# Altium PCB MAX96724_COUPON.PcbDoc
Units mm, origin at the board's own origin, x right, y up, seen from the top; angles counter-clockwise.
Board outline 191 x 184 mm, 2 copper layers (Top Layer, Bottom Layer); 179 components, 133 nets, 535 pads, 16 vias.
Unrouted connection lines stored in the file: 378.
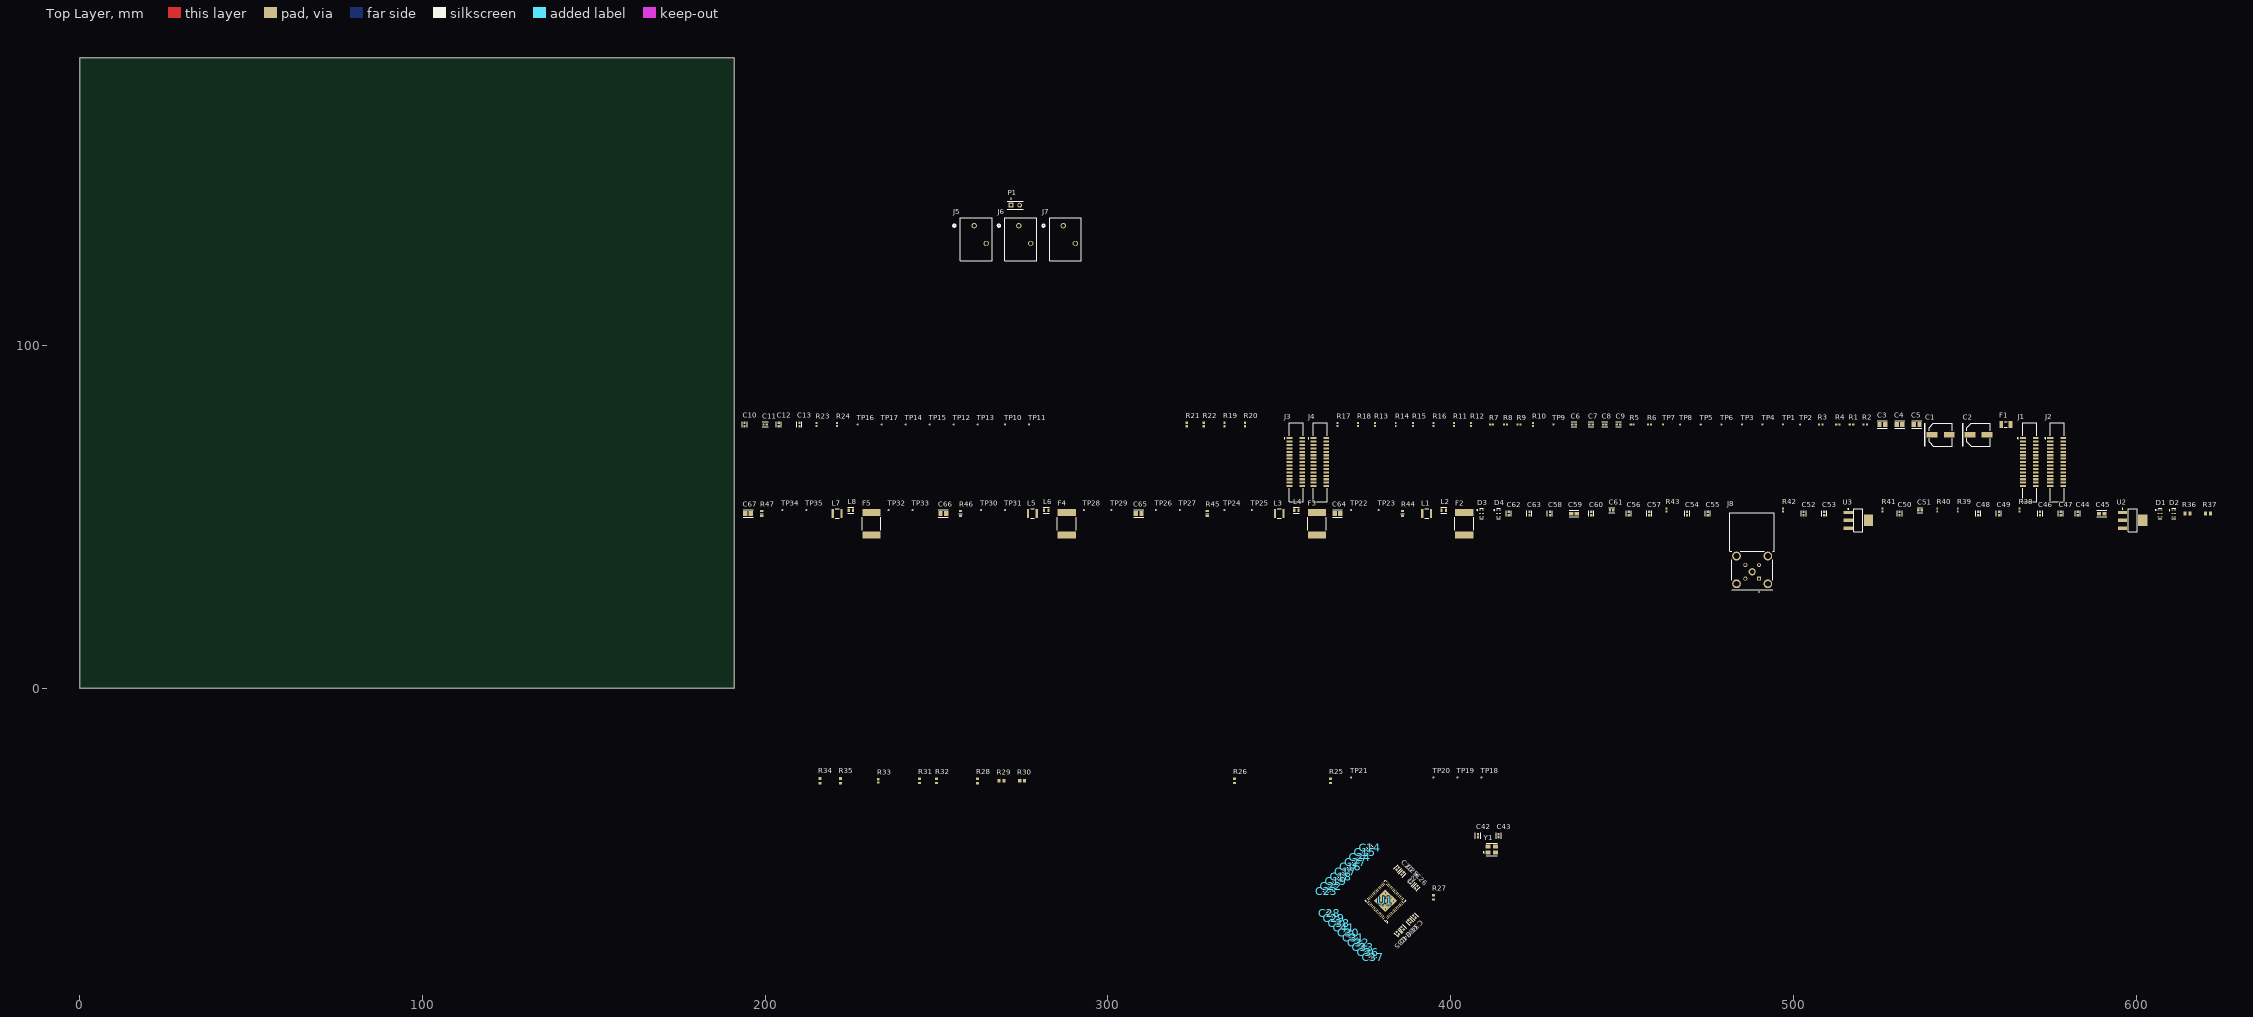
[diagram p0: Top Layer view]
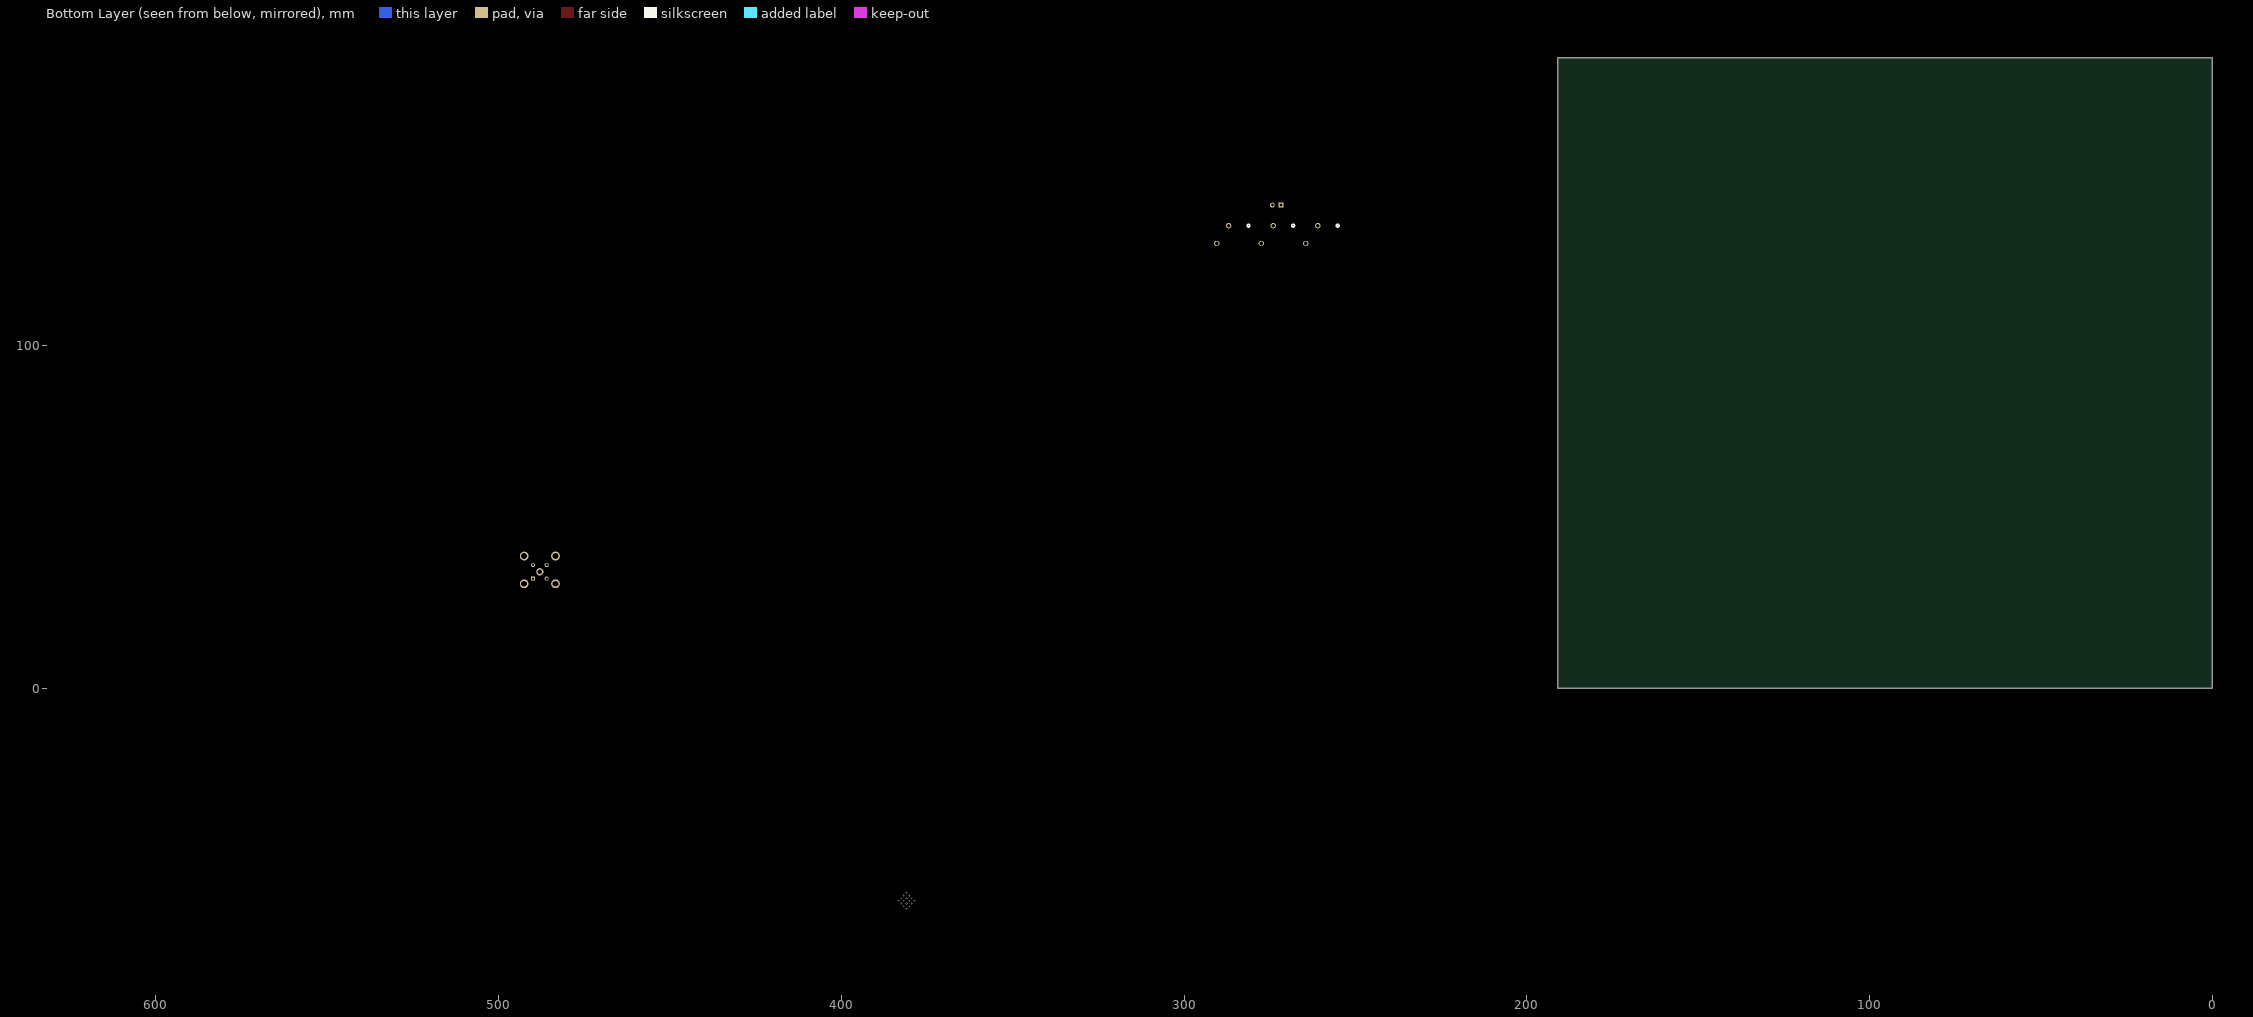
[diagram p1: Bottom Layer view, seen from below]

## Layer stack, top to bottom
Top Solder: solder mask 0.0102, Solder Resist, Dk 3.5
Top Layer: signal copper 0.0356
Dielectric 1: dielectric 0.32, FR-4, Dk 4.8
Bottom Layer: signal copper 0.0356
Bottom Solder: solder mask 0.0102, Solder Resist, Dk 3.5

## Board outline
0,0 0,184 191,184 191,0

## Design rules (kind name [scope] priority, off if disabled: settings)
Clearance [All] p1: gap=0.254 ignorepadtopadclearanceinfootprint=FALSE
DiffPairsRouting [All] p1: maxlimit=0.254 minlimit=0.254 mostfreqgap=0.254 toplayer_minwidth=0.381 toplayer_maxwidth=0.381 toplayer_prefwidth=0.381 bottomlayer_minwidth=0.381 bottomlayer_maxwidth=0.381 bottomlayer_prefwidth=0.381 maxuncoupledlength=12.7
PolygonConnect [All] p1: connectstyle=Relief reliefconductorwidth=0.254 reliefentries=4 polygonreliefangle="90 Angle" airgapwidth=0.254
RoutingVias [All] p1: holewidth=0.711 width=1.27 viastyle="Through Hole" minholewidth=0.711 minwidth=1.27 maxholewidth=0.711 maxwidth=1.27
SolderMaskExpansion [All] p1: expansion=0.102 istentingtop=FALSE
Width [All] p1: maxlimit=0.254 minlimit=0.254 preferedwidth=0.254
29 further rules are at their usual default settings.

## Classes and differential pairs
differential pair class 100DIFF: CKA CKB CKC CKF CSI0_CK CSI0_D0 CSI0_D1 CSI0_D2 CSI0_D3 CSI1_CK CSI1_D0 CSI1_D1 CSI1_D2 CSI1_D3 DA0 DA1 DA2 DA3 DB0 DB1 DB2 DB3 SIOA SIOB SIOC SIOD
net class 50SINGLE: PoC_A PoC_B PoC_C PoC_D
component class MAX96724_COUPON: C1 C2 C3 C4 C5 C6 C7 C8 C9 C10 C11 C12 C13 F1 J1 J2 J3 J4 J5 J6 J7 P1 R1 R2 R3 R4 R5 R6 R7 R8 R9 R10 R11 R12 R13 R14 R15 R16 R17 R18 R19 R20 R21 R22 R23 R24 TP1 TP2 TP3 TP4 TP5 TP6 TP7 TP8 TP9 TP10 TP11 TP12 TP13 TP14 TP15 TP16 TP17
component class GMSL_DESERIALIZER_0: C14 C15 C16 C17 C18 C19 C20 C21 C22 C23 C24 C25 C26 C27 C28 C29 C30 C31 C32 C33 C34 C35 C36 C37 C38 C39 C40 C41 C42 C43 C44 C45 C46 C47 C48 C49 C50 C51 C52 C53 C54 C55 C56 C57 C58 C59 C60 C61 C62 C63 C64 C65 C66 C67 D1 D2 D3 D4 F2 F3 F4 F5 J8 L1 L2 L3 L4 L5 L6 L7 L8 R25 R26 R27 R28 R29 R30 R31 R32 R33 R34 R35 R36 R37 R38 R39 R40 R41 R42 R43 R44 R45 R46 R47 TP18 TP19 TP20 TP21 TP22 TP23 TP24 TP25 TP26 TP27 TP28 TP29 TP30 TP31 TP32 TP33 TP34 TP35 U1 U2 U3 Y1
differential pair X25: +X25_P -X25_N
differential pair SIOD: +SIOD_P -SIOD_N
differential pair SIOC: +SIOC_P -SIOC_N
differential pair SIOB: +SIOB_P -SIOB_N
differential pair SIOA: +SIOA_P -SIOA_N
differential pair DB3: +DB3_P -DB3_N
differential pair DB2: +DB2_P -DB2_N
differential pair DB1: +DB1_P -DB1_N
differential pair DB0: +DB0_P -DB0_N
differential pair DA3: +DA3_P -DA3_N
differential pair DA2: +DA2_P -DA2_N
differential pair DA1: +DA1_P -DA1_N
differential pair DA0: +DA0_P -DA0_N
differential pair CSI1_D3: +CSI1_D3_P -CSI1_D3_N
differential pair CSI1_D2: +CSI1_D2_P -CSI1_D2_N
differential pair CSI1_D1: +CSI1_D1_P -CSI1_D1_N
differential pair CSI1_D0: +CSI1_D0_P -CSI1_D0_N
differential pair CSI1_CK: +CSI1_CK_P -CSI1_CK_N
differential pair CSI0_D3: +CSI0_D3_P -CSI0_D3_N
differential pair CSI0_D2: +CSI0_D2_P -CSI0_D2_N
differential pair CSI0_D1: +CSI0_D1_P -CSI0_D1_N
differential pair CSI0_D0: +CSI0_D0_P -CSI0_D0_N
differential pair CSI0_CK: +CSI0_CK_P -CSI0_CK_N
differential pair CKF: +CKF_P -CKF_N
differential pair CKC: +CKC_P -CKC_N
differential pair CKB: +CKB_P -CKB_N
differential pair CKA: +CKA_P -CKA_N

## Components (designator, comment, footprint, x,y, rotation, side; value= is the part's Value field where it differs from the comment)
C1 "EEEFK1E101XP" PNSC-FK-V-D8_V 543.001,74.001 r0 top
C2 "EEEFK1E101XP" PNSC-FK-V-D8_V 554.001,74.001 r0 top
C3 "GRM21BR61E226ME44L" FP-GRM21B-0_2-e0_2_0_7-IPC_B 526.001,77.001 r0 top
C4 "GRM21BR61E226ME44L" FP-GRM21B-0_2-e0_2_0_7-IPC_B 531.001,77.001 r0 top
C5 "GRM21BR61E226ME44L" FP-GRM21B-0_2-e0_2_0_7-IPC_B 536.001,77.001 r0 top
C6 "100n" FP-0402-L_1_0_0_05-W_0_5-IPC_A 436.001,77.001 r0 top
C7 "10u" FP-0402-L_1_0_0_05-W_0_5-IPC_A 441.001,77.001 r0 top
C8 "100n" FP-0402-L_1_0_0_05-W_0_5-IPC_A 445.001,77.001 r0 top
C9 "10u" FP-0402-L_1_0_0_05-W_0_5-IPC_A 449.001,77.001 r0 top
C10 "100n" FP-0402-L_1_0_0_05-W_0_5-IPC_A 194.001,77.001 r90 top
C11 "10u" FP-0402-L_1_0_0_05-W_0_5-IPC_A 200.001,77.001 r0 top
C12 "100n" FP-0402-L_1_0_0_05-W_0_5-IPC_A 204.001,77.001 r90 top
C13 "10u" FP-0402-L_1_0_0_05-W_0_5-IPC_A 210.001,77.001 r90 top
C14 "100n" FP-0402-L_1_0_0_05-W_0_5-IPC_A 376.536,-46.464 r135 top
C15 "100n" FP-0402-L_1_0_0_05-W_0_5-IPC_A 375.121,-47.879 r135 top
C16 "100n" FP-0402-L_1_0_0_05-W_0_5-IPC_A 370.879,-52.121 r135 top
C17 "100n" FP-0402-L_1_0_0_05-W_0_5-IPC_A 369.464,-53.536 r135 top
C18 "100n" FP-0402-L_1_0_0_05-W_0_5-IPC_A 368.05,-54.95 r135 top
C19 "100n" FP-0402-L_1_0_0_05-W_0_5-IPC_A 366.636,-56.364 r135 top
C20 "220n" FP-0402-L_1_0_0_05-W_0_5-IPC_A 384.586,-52.586 r45 top
C21 "220n" FP-0402-L_1_0_0_05-W_0_5-IPC_A 390,-58 r45 top
C22 "100n" FP-0402-L_1_0_0_05-W_0_5-IPC_A 365.222,-57.778 r135 top
C23 "100n" FP-0402-L_1_0_0_05-W_0_5-IPC_A 363.808,-59.192 r135 top
C24 "100n" FP-0402-L_1_0_0_05-W_0_5-IPC_A 373.707,-49.293 r135 top
C25 "220n" FP-0402-L_1_0_0_05-W_0_5-IPC_A 386.001,-54 r45 top
C26 "220n" FP-0402-L_1_0_0_05-W_0_5-IPC_A 388.586,-56.586 r45 top
C27 "100n" FP-0402-L_1_0_0_05-W_0_5-IPC_A 372.293,-50.707 r135 top
C28 "100n" FP-0402-L_1_0_0_05-W_0_5-IPC_A 364.686,-65.686 r225 top
C29 "100n" FP-0402-L_1_0_0_05-W_0_5-IPC_A 366.101,-67.101 r225 top
C30 "100n" FP-0402-L_1_0_0_05-W_0_5-IPC_A 370.343,-71.343 r225 top
C31 "100n" FP-0402-L_1_0_0_05-W_0_5-IPC_A 371.757,-72.757 r225 top
C32 "100n" FP-0402-L_1_0_0_05-W_0_5-IPC_A 373.172,-74.172 r225 top
C33 "100n" FP-0402-L_1_0_0_05-W_0_5-IPC_A 374.586,-75.586 r225 top
C34 "220n" FP-0402-L_1_0_0_05-W_0_5-IPC_A 389.414,-66.586 r315 top
C35 "220n" FP-0402-L_1_0_0_05-W_0_5-IPC_A 384.586,-71.414 r315 top
C36 "100n" FP-0402-L_1_0_0_05-W_0_5-IPC_A 376,-77 r225 top
C37 "100n" FP-0402-L_1_0_0_05-W_0_5-IPC_A 377.414,-78.414 r225 top
C38 "100n" FP-0402-L_1_0_0_05-W_0_5-IPC_A 367.515,-68.515 r225 top
C39 "220n" FP-0402-L_1_0_0_05-W_0_5-IPC_A 388,-68 r315 top
C40 "220n" FP-0402-L_1_0_0_05-W_0_5-IPC_A 386,-70 r315 top
C41 "100n" FP-0402-L_1_0_0_05-W_0_5-IPC_A 368.929,-69.929 r225 top
C42 "30p" FP-0402-L_1_0_0_05-W_0_5-IPC_A 408,-43 r90 top
C43 "30p" FP-0402-L_1_0_0_05-W_0_5-IPC_A 414,-43 r90 top
C44 "100n" FP-0402-L_1_0_0_05-W_0_5-IPC_A 583.001,51.001 r90 top
C45 "GRM188R60J106ME47D" FP-GRM188-0_1-e0_2_0_55-IPC_A 590.001,51.001 r0 top
C46 "10u" FP-0402-L_1_0_0_05-W_0_5-IPC_A 572.001,51.001 r90 top
C47 "100n" FP-0402-L_1_0_0_05-W_0_5-IPC_A 578.001,51.001 r90 top
C48 "10u" FP-0402-L_1_0_0_05-W_0_5-IPC_A 554.001,51.001 r90 top
C49 "100n" FP-0402-L_1_0_0_05-W_0_5-IPC_A 560.001,51.001 r90 top
C50 "10u" FP-0402-L_1_0_0_05-W_0_5-IPC_A 531.001,51.001 r90 top
C51 "100n" FP-0402-L_1_0_0_05-W_0_5-IPC_A 537.001,52.001 r0 top
C52 "10u" FP-0402-L_1_0_0_05-W_0_5-IPC_A 503.001,51.001 r90 top
C53 "100n" FP-0402-L_1_0_0_05-W_0_5-IPC_A 509.001,51.001 r90 top
C54 "10u" FP-0402-L_1_0_0_05-W_0_5-IPC_A 469.001,51.001 r90 top
C55 "10n" FP-0402-L_1_0_0_05-W_0_5-IPC_A 475.001,51.001 r90 top
C56 "10u" FP-0402-L_1_0_0_05-W_0_5-IPC_A 452.001,51.001 r90 top
C57 "10n" FP-0402-L_1_0_0_05-W_0_5-IPC_A 458.001,51.001 r90 top
C58 "100n" FP-0402-L_1_0_0_05-W_0_5-IPC_A 429.001,51.001 r90 top
C59 "GRM188R60J106ME47D" FP-GRM188-0_1-e0_2_0_55-IPC_A 436.001,51.001 r0 top
C60 "10u" FP-0402-L_1_0_0_05-W_0_5-IPC_A 441.001,51.001 r90 top
C61 "10n" FP-0402-L_1_0_0_05-W_0_5-IPC_A 447.001,52.001 r0 top
C62 "10u" FP-0402-L_1_0_0_05-W_0_5-IPC_A 417.001,51.001 r90 top
C63 "10n" FP-0402-L_1_0_0_05-W_0_5-IPC_A 423.001,51.001 r90 top
C64 "GRM21BR61E226ME44L" FP-GRM21B-0_2-e0_2_0_7-IPC_B 367.001,51.001 r0 top
C65 "GRM21BR61E226ME44L" FP-GRM21B-0_2-e0_2_0_7-IPC_B 309.001,51.001 r0 top
C66 "GRM21BR61E226ME44L" FP-GRM21B-0_2-e0_2_0_7-IPC_B 252.001,51.001 r0 top
C67 "GRM21BR61E226ME44L" FP-GRM21B-0_2-e0_2_0_7-IPC_B 195.001,51.001 r0 top
D1 "ESD204DQAR" FP-DQA0010A-MFG 607.001,51.001 r0 top value=0.55pF
D2 "ESD204DQAR" FP-DQA0010A-MFG 611.001,51.001 r0 top value=0.55pF
D3 "ESD204DQAR" FP-DQA0010A-MFG 409.001,51.001 r0 top value=0.55pF
D4 "ESD204DQAR" FP-DQA0010A-MFG 414.001,51.001 r0 top value=0.55pF
F1 "0466002.NR" FP-0466-MFG 562.001,77.001 r0 top value=0.03Ω
F2 "2920L050DR" FP-2920L050DR-MFG 404.001,48.001 r90 top
F3 "2920L050DR" FP-2920L050DR-MFG 361.001,48.001 r90 top
F4 "2920L050DR" FP-2920L050DR-MFG 288.001,48.001 r90 top
F5 "2920L050DR" FP-2920L050DR-MFG 231.001,48.001 r90 top
J1 "1-1734248-5" FP-1-1734248-5-MFG 569.001,66.001 r90 top
J2 "1-1734248-5" FP-1-1734248-5-MFG 577.001,66.001 r90 top
J3 "1-1734248-5" FP-1-1734248-5-MFG 355.001,66.001 r90 top
J4 "1-1734248-5" FP-1-1734248-5-MFG 362.001,66.001 r90 top
J5 "1-2834011-2" 1-2834011-2-Footprint-1 261.001,135.001 r0 top
J6 "1-2834011-2" 1-2834011-2-Footprint-1 274.001,135.001 r0 top
J7 "1-2834011-2" 1-2834011-2-Footprint-1 287.001,135.001 r0 top
J8 "FM4-NZRP-PCB-1" FM4-NZRP-PCB-1-Footprint-1 488.001,34.001 r90 top
L1 "ADL32VHC-220M" FP-1210POC-MFG 393.001,51.001 r0 top value=22uH
L2 "PFL1609-561MEW" FP-PFL1609-MFG 398.001,52.001 r0 top value=0.56uH
L3 "ADL32VHC-220M" FP-1210POC-MFG 350.001,51.001 r0 top value=22uH
L4 "PFL1609-561MEW" FP-PFL1609-MFG 355.001,52.001 r0 top value=0.56uH
L5 "ADL32VHC-220M" FP-1210POC-MFG 278.001,51.001 r0 top value=22uH
L6 "PFL1609-561MEW" FP-PFL1609-MFG 282.001,52.001 r0 top value=0.56uH
L7 "ADL32VHC-220M" FP-1210POC-MFG 221.001,51.001 r0 top value=22uH
L8 "PFL1609-561MEW" FP-PFL1609-MFG 225.001,52.001 r0 top value=0.56uH
P1 "5-146280-2" TECO-5-146280-2_V 273,141 r0 top
R1 "0402 JUMPER" RESC1005X40X25ML05T05 517.001,77.001 r0 top
R2 "0402 JUMPER" RESC1005X40X25ML05T05 521.001,77.001 r0 top
R3 "0402 JUMPER" RESC1005X40X25ML05T05 508.001,77.001 r0 top
R4 "0402 JUMPER" RESC1005X40X25ML05T05 513.001,77.001 r0 top
R5 "RC0402JR-070RL" RESC1005X40X25NL05T10 453.001,77.001 r0 top
R6 "RC0402JR-070RL" RESC1005X40X25NL05T10 458.001,77.001 r0 top
R7 "RC0402JR-070RL" RESC1005X40X25NL05T10 412.001,77.001 r0 top
R8 "RC0402JR-070RL" RESC1005X40X25NL05T10 416.001,77.001 r0 top
R9 "RC0402JR-070RL" RESC1005X40X25NL05T10 420.001,77.001 r0 top
R10 "RC0402JR-070RL" RESC1005X40X25NL05T10 424.001,77.001 r90 top
R11 "RC0402JR-070RL" RESC1005X40X25NL05T10 401.001,77.001 r90 top
R12 "RC0402JR-070RL" RESC1005X40X25NL05T10 406.001,77.001 r90 top
R13 "RC0402JR-070RL" RESC1005X40X25NL05T10 378.001,77.001 r90 top
R14 "RC0402JR-070RL" RESC1005X40X25NL05T10 384.001,77.001 r90 top
R15 "RC0402JR-070RL" RESC1005X40X25NL05T10 389.001,77.001 r90 top
R16 "RC0402JR-070RL" RESC1005X40X25NL05T10 395.001,77.001 r90 top
R17 "RC0402JR-070RL" RESC1005X40X25NL05T10 367.001,77.001 r90 top
R18 "RC0402JR-070RL" RESC1005X40X25NL05T10 373.001,77.001 r90 top
R19 "0402 JUMPER" RESC1005X40X25ML05T05 334.001,77.001 r90 top
R20 "0402 JUMPER" RESC1005X40X25ML05T05 340.001,77.001 r90 top
R21 "0402 JUMPER" RESC1005X40X25ML05T05 323.001,77.001 r90 top
R22 "0402 JUMPER" RESC1005X40X25ML05T05 328.001,77.001 r90 top
R23 "RC0402JR-070RL" RESC1005X40X25NL05T10 215.001,77.001 r90 top
R24 "RC0402JR-070RL" RESC1005X40X25NL05T10 221.001,77.001 r90 top
R25 "ERJ3EKF2201V" RESC1608X55X30LL15T15 365.001,-26.999 r90 top
R26 "ERJ3EKF2201V" RESC1608X55X30LL15T15 337.001,-26.999 r90 top
R27 "ERJ-3EKF4020V" RESC1608X55X30LL15T15 395,-61 r90 top
R28 "ERJ3EKF1002V" RESC1609X55X30LL15T15 262.001,-26.999 r90 top
R29 "ERJ-3EKF49R9V" RESC1608X55X30ML15T15 269.001,-26.999 r0 top
R30 "ERJ-3EKF49R9V" RESC1608X55X30ML15T15 275.001,-26.999 r0 top
R31 "ERJ-3EKF8062V" RESC1608X55X30LL15T15 245.001,-26.999 r90 top
R32 "ERJ-3EKF8062V" RESC1608X55X30LL15T15 250.001,-26.999 r90 top
R33 "0402 JUMPER" RESC1005X40X25ML05T05 233.001,-26.999 r90 top
R34 "ERJ-3EKF2052V" RESC1608X55X30NL15T15 216.001,-26.999 r90 top
R35 "ERJ-3EKF2052V" RESC1608X55X30NL15T15 222.001,-26.999 r90 top
R36 "ERJ-3EKF49R9V" RESC1608X55X30ML15T15 615.001,51.001 r0 top
R37 "ERJ-3EKF49R9V" RESC1608X55X30ML15T15 621.001,51.001 r0 top
R38 "RC0402JR-070RL" RESC1005X40X25NL05T10 566.001,52.001 r90 top
R39 "RC0402JR-070RL" RESC1005X40X25NL05T10 548.001,52.001 r90 top
R40 "RC0402JR-070RL" RESC1005X40X25NL05T10 542.001,52.001 r90 top
R41 "RC0402JR-070RL" RESC1005X40X25NL05T10 526.001,52.001 r90 top
R42 "RC0402JR-070RL" RESC1005X40X25NL05T10 497.001,52.001 r90 top
R43 "RC0402JR-070RL" RESC1005X40X25NL05T10 463.001,52.001 r90 top
R44 "ERJ-3EKF5101V" FP-ERJ3EK-MFG 386.001,51.001 r90 top
R45 "ERJ-3EKF5101V" FP-ERJ3EK-MFG 329.001,51.001 r90 top
R46 "ERJ-3EKF5101V" FP-ERJ3EK-MFG 257.001,51.001 r90 top
R47 "ERJ-3EKF5101V" FP-ERJ3EK-MFG 199.001,51.001 r90 top
TP1 "TPAD6R" "New footprint 1" 497.001,77.001 r90 top
TP2 "TPAD6R" "New footprint 1" 502.001,77.001 r90 top
TP3 "TPAD6R" "New footprint 1" 485.001,77.001 r90 top
TP4 "TPAD6R" "New footprint 1" 491.001,77.001 r90 top
TP5 "TPAD6R" "New footprint 1" 473.001,77.001 r90 top
TP6 "TPAD6R" "New footprint 1" 479.001,77.001 r90 top
TP7 "TPAD6R" "New footprint 1" 462.001,77.001 r90 top
TP8 "TPAD6R" "New footprint 1" 467.001,77.001 r90 top
TP9 "TPAD6R" "New footprint 1" 430.001,77.001 r90 top
TP10 "TPAD6R" "New footprint 1" 270.001,77.001 r90 top
TP11 "TPAD6R" "New footprint 1" 277.001,77.001 r90 top
TP12 "TPAD6R" "New footprint 1" 255.001,77.001 r90 top
TP13 "TPAD6R" "New footprint 1" 262.001,77.001 r90 top
TP14 "TPAD6R" "New footprint 1" 241.001,77.001 r90 top
TP15 "TPAD6R" "New footprint 1" 248.001,77.001 r90 top
TP16 "TPAD6R" "New footprint 1" 227.001,77.001 r90 top
TP17 "TPAD6R" "New footprint 1" 234.001,77.001 r90 top
TP18 "TPAD6R" "New footprint 1" 409.001,-25.999 r90 top
TP19 "TPAD6R" "New footprint 1" 402.001,-25.999 r90 top
TP20 "TPAD6R" "New footprint 1" 395.001,-25.999 r90 top
TP21 "TPAD6R" "New footprint 1" 371.001,-25.999 r90 top
TP22 "TPAD6R" "New footprint 1" 371.001,52.001 r90 top
TP23 "TPAD6R" "New footprint 1" 379.001,52.001 r90 top
TP24 "TPAD6R" "New footprint 1" 334.001,52.001 r90 top
TP25 "TPAD6R" "New footprint 1" 342.001,52.001 r90 top
TP26 "TPAD6R" "New footprint 1" 314.001,52.001 r90 top
TP27 "TPAD6R" "New footprint 1" 321.001,52.001 r90 top
TP28 "TPAD6R" "New footprint 1" 293.001,52.001 r90 top
TP29 "TPAD6R" "New footprint 1" 301.001,52.001 r90 top
TP30 "TPAD6R" "New footprint 1" 263.001,52.001 r90 top
TP31 "TPAD6R" "New footprint 1" 270.001,52.001 r90 top
TP32 "TPAD6R" "New footprint 1" 236.001,52.001 r90 top
TP33 "TPAD6R" "New footprint 1" 243.001,52.001 r90 top
TP34 "TPAD6R" "New footprint 1" 205.001,52.001 r90 top
TP35 "TPAD6R" "New footprint 1" 212.001,52.001 r90 top
U1 "MAX96724FGTN/V+" MAX96724FGTN_V+-Footprint-1 381,-62 r135 top
U2 "LD1117S18TR" SOT-223_M 599.001,49.001 r0 top
U3 "LD1117S12TR" SOT-223_M 519.001,49.001 r0 top
Y1 "ABM8G-25.000MHZ-18-D2Y-T" FP-ABM8G-MFG 412,-47 r0 top

## Footprints (in the part's own frame and the unit in brackets; to place one, negate y for a bottom-side part, rotate by r counter-clockwise, add the part's x,y. Pads: shape width x height; smd on the part's side, far side on the other; paste and mask are expansions set on the pad)
1-2834011-2-Footprint-1 [mil]
  round 62 / inner round 60 / far side round 62 hole 42 paste-99999 mask+0: 1(0,0) 2(137.8,-204.72)
  silkscreen extent -243,-402 206,92, body extent -132,-386 202,86, height 499
FM4-NZRP-PCB-1-Footprint-1 [mm]
  rect 1.2x1.2 hole 0.7: 1(-2,-2)
  round 1.2 hole 0.7: 2(2,-2) 3(2,2) 4(-2,2)
  round 2.1 hole 1.4: MH1(0,0)
  round 2.55 hole 1.7: MH2(-3.5,-4.575) MH3(4.6,-4.575) MH4(4.6,4.575) MH5(-3.5,4.575)
  silkscreen extent -5.9,-6.5 17.25,6.5, body extent -4.76,-5.84 17.8,6.14, height 15.63
FP-1-1734248-5-MFG [mm]
  rect 0.6x1.65 smd paste+0 mask+0: 1(7,-1.75) 2(6,-1.75) 3(5,-1.75) 4(4,-1.75) 5(3,-1.75) 6(2,-1.75) 7(1,-1.75) 8(0,-1.75) 9(-1,-1.75) 10(-2,-1.75) 11(-3,-1.75) 12(-4,-1.75) 13(-5,-1.75) 14(-6,-1.75) 15(-7,-1.75)
  rect 0.6x1.85 smd paste+0 mask+0: 1(7,2) 2(6,2) 3(5,2) 4(4,2) 5(3,2) 6(2,2) 7(1,2) 8(0,2) 9(-1,2) 10(-2,2) 11(-3,2) 12(-4,2) 13(-5,2) 14(-6,2) 15(-7,2)
  silkscreen extent -11.55,-2.07 11.55,3.6, body extent -11.65,-2.67 11.65,3.02, height 0.25
FP-0402-L_1_0_0_05-W_0_5-IPC_A [mm]
  rect 0.715x0.672 smd paste+0 mask+0: 1(-0.479,0) 2(0.479,0)
  silkscreen extent -0.84,-0.74 0.84,0.74, body extent -1.04,-0.54 1.04,0.54, height 0.25
FP-0466-MFG [mil]
  rect 45x80 smd paste+0 mask+0: 1(-52.5,0) 2(52.5,0)
  silkscreen extent -15,-32 15,32, body extent -79,-44 79,44, height 10
FP-1210POC-MFG [mm]
  rect 0.65x2.65 smd paste+0 mask+0: 1(-1.27,0) 2(1.27,0)
  silkscreen extent -0.57,-1.34 0.57,1.34, body extent -1.75,-1.44 1.75,1.44, height 0.25
FP-2920L050DR-MFG [mm]
  rect 2x5.3 smd paste+0 mask+0: 1(-3.3,0) 2(3.3,0)
  silkscreen extent -1.92,-2.72 1.92,2.72, body extent -4.4,-2.82 4.4,2.82, height 0.25
FP-ABM8G-MFG [mm]
  rect 1.4x1.2 smd paste+0 mask+0: 1(-1.1,-0.85) 2(1.1,-0.85) 3(1.1,0.85) 4(-1.1,0.85)
  silkscreen extent -2.47,-1.83 1.6,1.83, body extent -1.9,-1.55 1.9,1.55, height 0.25
FP-DQA0010A-MFG [mm]
  rrect50% 0.565x0.2 smd paste+0 mask+0: 1(-0.417,1) 2(-0.417,0.5) 4(-0.417,-0.5) 5(-0.417,-1) 6(0.417,-1) 7(0.417,-0.5) 9(0.417,0.5) 10(0.417,1)
  rrect25% 0.565x0.4 smd paste-1000 mask+0: 3(-0.417,0) 8(0.417,0)
  silkscreen extent -1.37,-1.48 0.55,1.48, body extent -0.8,-1.4 0.8,1.4, height 0.25
FP-ERJ3EK-MFG [mm]
  rect 0.65x0.9 smd paste+0 mask+0: 1(-0.725,0) 2(0.725,0)
  silkscreen extent 0,-0.48 0,0.48, body extent -1.15,-0.58 1.15,0.58, height 0.25
FP-GRM21B-0_2-e0_2_0_7-IPC_B [mm]
  rect 1.255x1.456 smd paste+0 mask+0: 1(-0.826,0) 2(0.826,0)
  silkscreen extent -1.45,-1.13 1.45,1.13, body extent -1.7,-0.98 1.7,0.98, height 0.25
FP-GRM188-0_1-e0_2_0_55-IPC_A [mm]
  rect 1.208x1.012 smd paste+0 mask+0: 1(-0.802,0) 2(0.802,0)
  silkscreen extent -1.41,-0.91 1.41,0.91, body extent -1.91,-1.01 1.91,1.01, height 0.25
FP-PFL1609-MFG [mm]
  rect 0.64x1.02 smd paste+0 mask+0: 1(-0.635,0) 2(0.635,0)
  silkscreen extent -0.9,-0.89 0.9,0.89, body extent -1.05,-0.64 1.05,0.64, height 0.25
MAX96724FGTN_V+-Footprint-1 [mm]
  oval 0.95x0.25 smd: 1(-3.875,3.25) 2(-3.875,2.75) 3(-3.875,2.25) 4(-3.875,1.75) 5(-3.875,1.25) 6(-3.875,0.75) 7(-3.875,0.25) 8(-3.875,-0.25) 9(-3.875,-0.75) 10(-3.875,-1.25) 11(-3.875,-1.75) 12(-3.875,-2.25) 13(-3.875,-2.75) 14(-3.875,-3.25) 29(3.875,-3.25) 30(3.875,-2.75) 31(3.875,-2.25) 32(3.875,-1.75) 33(3.875,-1.25) 34(3.875,-0.75) 35(3.875,-0.25) 36(3.875,0.25) 37(3.875,0.75) 38(3.875,1.25) 39(3.875,1.75) 40(3.875,2.25) 41(3.875,2.75) 42(3.875,3.25)
  oval 0.25x0.95 smd: 15(-3.25,-3.875) 16(-2.75,-3.875) 17(-2.25,-3.875) 18(-1.75,-3.875) 19(-1.25,-3.875) 20(-0.75,-3.875) 21(-0.25,-3.875) 22(0.25,-3.875) 23(0.75,-3.875) 24(1.25,-3.875) 25(1.75,-3.875) 26(2.25,-3.875) 27(2.75,-3.875) 28(3.25,-3.875) 43(3.25,3.875) 44(2.75,3.875) 45(2.25,3.875) 46(1.75,3.875) 47(1.25,3.875) 48(0.75,3.875) 49(0.25,3.875) 50(-0.25,3.875) 51(-0.75,3.875) 52(-1.25,3.875) 53(-1.75,3.875) 54(-2.25,3.875) 55(-2.75,3.875) 56(-3.25,3.875)
  rect 4.7x4.7 smd: 57(0,0)
  silkscreen extent -4.97,-4.2 4.2,4.2, body extent -4.05,-4.05 4.05,4.05, height 0.8
"New footprint 1" [mm]
  round 0.6 smd paste-1: 1(0,0)
PNSC-FK-V-D8_V [mm] "CAPAE, 2-Leads, Body 6.80x6.80mm"
  rect 3.2x1.6 smd: 1(-2.5,0) 2(2.5,0)
  silkscreen extent -4.6,-3.4 3.4,3.4, body extent -3.9,-3.4 3.9,3.4, height 8
RESC1005X40X25ML05T05 [mm] "Chip Resistor, 2-Leads, Body 1.00x0.50mm, IPC Low Density"
  rect 0.65x0.65 smd: 1(-0.5,0) 2(0.5,0)
  body extent -0.53,-0.27 0.53,0.28, height 0.4
RESC1005X40X25NL05T10 [mm] "Chip Resistor, 2-Leads, Body 1.00x0.50mm, IPC Medium Density"
  rect 0.6x0.55 smd: 1(-0.425,0) 2(0.425,0)
  body extent -0.53,-0.27 0.53,0.28, height 0.4
RESC1608X55X30LL15T15 [mm] "Chip Resistor, 2-Leads, Body 1.60x0.80mm, IPC High Density"
  rect 0.7x0.85 smd: 1(-0.625,0) 2(0.625,0)
  body extent -0.87,-0.48 0.87,0.48, height 0.55
RESC1608X55X30ML15T15 [mm] "Chip Resistor, 2-Leads, Body 1.60x0.80mm, IPC Low Density"
  rect 0.9x1.05 smd: 1(-0.725,0) 2(0.725,0)
  body extent -0.87,-0.48 0.87,0.48, height 0.55
RESC1608X55X30NL15T15 [mm] "Chip Resistor, 2-Leads, Body 1.60x0.80mm, IPC Medium Density"
  rect 0.8x0.95 smd: 1(-0.675,0) 2(0.675,0)
  body extent -0.87,-0.48 0.87,0.48, height 0.55
RESC1609X55X30LL15T15 [mm] "Chip Resistor, 2-Leads, Body 1.75x0.95mm, IPC High Density"
  rect 0.75x0.85 smd: 1(-0.65,0) 2(0.65,0)
  body extent -0.87,-0.48 0.87,0.48, height 0.55
SOT-223_M [mm] "SOT223, 4-Leads, Body 6.5x3.5mm, Pitch 2.3mm, Lead Span 7mm, IPC Low Density"
  rect 2.7x1 smd: 1(-2.95,2.3) 2(-2.95,0) 3(-2.95,-2.3)
  rect 2.7x3.3 smd: 4(2.95,0)
  silkscreen extent -3.07,-3.35 1.3,3.47, body extent -1.85,-3.35 1.85,3.35, height 1.8
TECO-5-146280-2_V [mm] "Connector, 2-Leads, Body 4.67x2.34mm, Pitch 2.54mm"
  rect 1.4x1.4 hole 0.89: 1(-1.27,0)
  round 1.4 hole 0.89: 2(1.27,0)
  silkscreen extent -2.33,-1.17 2.33,1.94, body extent -2.34,-1.17 2.34,1.17, height 5.33

## Part data
C1 C2: library part CMP-2000-06206-1, "Aluminum Electrolytic Capacitor, 100 uF, +/- 20%, 25 V, 2-Pin SMD (Size Code D8), -55 to 105 degC, RoHS, Tape and Reel", Capacitance=100µF, Case Size/Dimension=Ø6.3x7.7mm, Lifetime@Temperature=2000Hrs@105°C, Manufacturer=Panasonic, Operating Temp Range=-55to+105°C, Operating Temp-Max=105°C, Package Description="2-Pin Electrolytic Aluminum Capacitor, Body 6.6 x 6.6 mm", Package Reference=FK-V-D8, Rated Voltage=25V, Ripple Current=280mA, Datasheet URL=http://industrial.panasonic.com/cdbs/www-data/pdf/RDE0000/ABA0000C1181.pdf, Datasheet Version=03/2016, Impedance=0.34O, Manufacturer URL=http://www.panasonic.com/, Mounting Technology=SurfaceMount, Package URL=http://industrial.panasonic.com/cdbs/www-data/pdf/RDE0000/DME0000COL48.pdf, Series=FK, Type=Can
C3 C4 C5 C64 C65 C66 C67: library part CMP-2007-03222-3, "Chip Multilayer Ceramic Capacitors for General Purpose, 0805, 22uF, X5R, 15%, 20%, 25V", Capacitance=22uF, Case Code (Imperial)=0805, Case Code (Metric)=2012, Dielectric=X5R, Max Operating Temperature=85°C, Min Operating Temperature=-55°C, Package Quantity=3000, Resistor Type=Ceramic, Tolerance=20%, Voltage=25V, Case/Package=0805, Depth=1.25mm, Height=1.25mm, Lead Free="Lead Free", Length=2mm, Material=Ceramic, Mount="Surface Mount", Packaging="Tape and Reel", REACH SVHC="No SVHC", Termination=SMD/SMT, Thickness=0.057inch, Voltage Rating=25V, Voltage Rating (DC)=25V, Weight=0.000335oz, Width=1.25mm
C6 C7 C8 C9 C10 C11 C12 C13 C14 C15 C16 C17 C18 C19 C20 C21 C22 C23 C24 C25 C26 C27 C28 C29 C30 C31 C32 C33 C34 C35 C36 C37 C38 C39 C40 C41 C42 C43 C44 C46 C47 C48 C49 C50 C51 C52 C53 C54 C55 C56 C57 C58 C60 C61 C62 C63: library part CMP-001-00058-1, "LARGE PADS, 0402 CAP, CHANGE COMMENT TO MATCH REAL P/N", Capacitor Type=Ceramic, Case/Package=0402, Max Operating Temperature=85°C, Min Operating Temperature=-55°C, Mounting Technology="Surface Mount", Pins=2, RoHS Compliant=Yes
C45 C59: library part CMP-2006-02792-2, "Chip Multilayer Ceramic Capacitors for General Purpose, 0603, 10uF, X5R, 15%, 20%, 6.3V", Capacitance=10uF, Case Code (Imperial)=0603, Case Code (Metric)=1608, Dielectric=X5R, Max Operating Temperature=85°C, Min Operating Temperature=-55°C, Package Quantity=4000, Tolerance=20%, Voltage=6.3V, Case/Package=0603, Depth=0.8mm, Height=0.8mm, Lead Free="Lead Free", Length=1.6mm, Material=Ceramic, Mount="Surface Mount", Packaging="Tape and Reel", Radiation Hardening=No, REACH SVHC="No SVHC", Termination=SMD/SMT, Thickness=0.035inch, Voltage Rating=6.3V, Voltage Rating (DC)=6.3V, Width=0.031inch
D1 D2 D3 D4: library part CMP-04989-000002-1, "4-CHANNEL LOW-CAPACITANCE SURGE", Ambient Temperature Range High=+125°C, Ambient Temperature Range Low=-40°C, Breakdown Voltage=5.5V, Capacitance=0.55pF, Clamping Voltage=11.5V, Manufacturer="Texas Instruments", Package=DQA0010A, Peak Pulse Current=5.5A, Peak Pulse Power=50W, Reverse Standoff Voltage=3.6V, Temperature="-40°C to +125°C", Automotive=No, Category=Diode, ComponentLink2Description=Datasheet, ComponentLink2URL=http://www.ti.com/lit/ds/symlink/esd204.pdf, Device Class L1="Circuit Protection", Device Class L2="TVS Diodes", Device Class L3=unset, Digikey Description="4-CHANNEL LOW-CAPACITANCE SURGE", Direction=Bidirectional, Height=0.55mm, Lead Free=Yes, Manufacturer Part Number=ESD204DQAR, Mouser Description="4-Channel Low-Capacitance Surge and ESD Protection Diode 10-USON -40 to 125", Number Of Channels=4, Octopart=https://octopart.com/esd204dqar-texas+instruments-89917476, RoHS=TRUE, Standoff Height=0mm, Temperature Range High=+125°C, Temperature Range Low=-40°C
F1: library part CMP-2000-05742-2, "FUSE BOARD MNT 2A 63VAC/VDC 1206", Fuse Current=2A, Fuse Interrupt Ac Current=50A, Fuse Voltage Drop=78.73mV, Manufacturer=Littelfuse, Max Fuse Ac Voltage=63V, Package=0466, Resistance=0.03Ω, Temperature="-55°C to +90°C", Temperature Range High=+90°C, Temperature Range Low=-55°C, Automotive=No, Category=Fuse, ComponentLink2Description=Datasheet, ComponentLink2URL=https://www.littelfuse.com/~/media/electronics/datasheets/fuses/littelfuse_fuse_466_datasheet.pdf.pdf, Device Class L1="Circuit Protection", Device Class L2=Fuses, Device Class L3=unset, Digikey Description="FUSE BOARD MNT 2A 63VAC/VDC 1206", Fuse Blow Speed=Fast, Fuse I2T=0.2326A2Sec, Fuse Interrupt Dc Current=50A, Height=0.66mm, Lead Free=Yes, Manufacturer Part Number=0466002.NR, Max Fuse Dc Voltage=63V, Mouser Description="466 Series Very Fast-Acting 63 V 2 A 1206 Surface Mount Thin Film Fuse", Octopart=https://octopart.com/0466002.nr-littelfuse-566006, RoHS=TRUE, Voltage Rating=63V
F2 F3 F4 F5: library part CMP-08606-000071-1, "PTC RESET FUSE 60V 500MA 2920", Case Code (Imperial)=2920, Case Code (Metric)=7351, Current Rating=10A, Hold Current=500mA, Max Operating Temperature=85°C, Max Voltage Rating (DC)=60V, Min Operating Temperature=-40°C, Package Quantity=1500, Power Dissipation=1.5W, Resistance=1.4R, Trip Current=1A, Approvals=cULus, Case/Package=2920, Height=1.25mm, Lead Free="Lead Free", Length=7.98mm, Max Current Rating=10A, Operating Supply Voltage=60V, Packaging="Tape and Reel", REACH SVHC="No SVHC", RoHS Compliant=Yes, Series=2920L, Terminal Material=Copper, Termination=SMD/SMT, Time to Trip=4s, Voltage Rating=60V, Voltage Rating (DC)=60V, Width=5.44mm, Working Voltage=60V
J1 J2 J3 J4: library part CMP-03368-000001-1, "CONN FPC VERT 15POS 1.00MM SMD", Current Rating=1A, Manufacturer=TE, Package=0, Temperature="-20°C to +85°C", Temperature Range High=+85°C, Temperature Range Low=-20°C, Voltage Rating=125V, Automotive=No, Category=Conn, ComponentLink2Description=Datasheet, ComponentLink2URL=https://www.te.com/commerce/DocumentDelivery/DDEController?Action=showdoc&DocId=Customer+Drawing%7F1734248%7FE1%7Fpdf%7FEnglish%7FENG_CD_1734248_E1__.pdf%7F1-1734248-5, Conn Gender=Female, Conn Orientation=Vertical, Contact Material=Gold,Nickel, Device Class L1=Connectors, Device Class L2="FFC / FPC", Device Class L3=unset, Digikey Description="CONN FPC VERT 15POS 1.00MM SMD", Height=8mm, Is Female=yes, Lead Free=Yes, Manufacturer Part Number=1-1734248-5, Mounting Type="Surface Mount", Mouser Description="FFC & FPC Connectors 15P 1.0 FPC, Zip V/T SMT", Number Of Contacts=15, Octopart=https://octopart.com/1-1734248-5-te+connectivity-40620898, Pitch=1mm, RoHS=TRUE
J5 J6 J7: library part CMP-002-00067-1, "Barrier Strip Terminal Block", RoHS Compliant=Yes
J8: library part CMP-002-00044-2, "Connector RF Mini-FAKRA Plug 9GHz 50Ohm Solder Right Angle Through Hole", Component Type=Standard, Design Item ID=CMP-002-00085-1, Pins=9, Source=fakra4ch.SchLib
L1 L3 L5 L7: library part CMP-11268-000041-1, "NOT COILCRAFT - ACTUAL P# --> ADL32VHC-220M /  - Power Injection Chokes for PoC", Ambient Temperature Range High=+125°C, Ambient Temperature Range Low=-40°C, Inductance=22uH, Manufacturer=coilcraft, Manufacturer Part Number=1210POC-223MRC, Package=1210POC, Rms Current=700mA, Saturation Current=720mA, Self Resonant Frequency=70MHz, Series Resistance=0.88Ω, Test Frequency=100kHz, Tolerance=20%, Automotive=Yes, Automotive Grade="Grade 1", Category=Ind, ComponentLink2Description=Datasheet, ComponentLink2URL=https://drive.google.com/open?id=15FlOq8Y4YbRFohfA_cJ40jgnqs8va2Mh, Core Material=Ferrite, Device Class L1="Passive Components", Device Class L2=Inductors, Device Class L3="Fixed Inductors", Height=3mm, Lead Free=Yes, Octopart=https://octopart.com/1210poc-223mrc-coilcraft-103207315, RoHS=TRUE
L2 L4 L6 L8: library part CMP-11268-000007-1, "Fixed Inductors PFL1609 Low Profile 0.56 uH 20 % 1.4 A", Ambient Temperature Range High=+105°C, Ambient Temperature Range Low=-40°C, Inductance=0.56uH, Manufacturer=coilcraft, Package=PFL1609, Rms Current=1100mA, Saturation Current=710mA, Self Resonant Frequency=600MHz, Series Resistance=130mΩ, Test Frequency=7.9MHz, Tolerance=20%, Automotive=Yes, Automotive Grade="Grade 1", Category=Ind, ComponentLink2Description=Datasheet, ComponentLink2URL=https://www.coilcraft.com/pdfs/pfl1609.pdf, Composition=Wirewound, Core Material=Composite, Device Class L1="Passive Components", Device Class L2=Inductors, Device Class L3="Fixed Inductors", Height=0.95mm, Lead Free=Yes, Manufacturer Part Number=PFL1609-561MEW, Mouser Description="Fixed Inductors PFL1609 Low Profile 0.56 uH 20 % 1.4 A", Octopart=https://octopart.com/pfl1609-561mew-coilcraft-20329171, RoHS=TRUE, Shielding=true
P1: library part CMP-2000-07492-1, "Male Header, Pitch 2.54 mm, 1 x 2 Position, Height 8.21 mm, Tail Length 3.05 mm, -65 to 105 degC, RoHS, Bulk", Case\/Package=100, Colour=Black, Current Rating=3A, Flammability Rating=UL94V-0, High Temperature Housing=Yes, Manufacturer="TE Connectivity", Max Current Rating=5A, Max Operating Temperature=105degC, Min Operating Temperature=-65degC, Package Description="Male Header, Pitch 2.54 mm, 1 x 2 Position, Height 8.21 mm, Tail Length 3.05 mm", Package Quantity=500, Approvals=CSA, Board Standoff=No(Without), Connector Type=Header, Contact Gender=Male, Contact Material=CopperAlloy, Contact Mating Length=0.23inch, Contact Plating=Matte, Contact Protection=No(Without), Contact Shape=Square, Datasheet URL=http://www.te.com/commerce/DocumentDelivery/DDEController?Action=showdoc&DocId=Customer+Drawing%7F146280%7FH1%7Fpdf%7FEnglish%7FENG_CD_146280_H1.pdf%7F5-146280-2, Datasheet Version="Rev. H1, 08/2016", Depth=2.34mm, Gasket=No(Without), High Speed Serial Data Connector=No, Housing Colour=Black, Housing Material=Polymer, Keyed=No, Length=4.67mm, Manufacturer URL=http://www.te.com/, Mating Alignment=No(Without), Mating Connector Lock=No(Without), Mating Post Length=0.23inch, Mount=ThroughHole, Mounting Technology=ThroughHole, Number Of Contacts=2, Number of Positions=2, Number of Rows=1, Orientation=Straight, Package Reference=5-146280-2, Packaging=Carton, Panel Mount Retention=No(Without), PCB Mount Retention=Without, PCB Mounting Orientation=Vertical, PCB Thickness=0.063inch, Pitch=2.54mm, Radiation Hardening=No, RoHSCompliant=true, Row Spacing=2.54mm, Selectively Loaded=No(Without), Stabilizers=No(Without), Termination=ThroughHole, Termination Post Length=0.12inch
R1 R2 R3 R4 R19 R20 R21 R22 R33: library part CMP-009-00118-2, "READ THE NAME", Component Type=Standard, Design Item ID=CMP-009-00206-2, Pins=2, Source=0402jump.SchLib
R5 R6 R7 R8 R9 R10 R11 R12 R13 R14 R15 R16 R17 R18 R23 R24 R38 R39 R40 R41 R42 R43: library part CMP-1011-00001-2, Manufacturer="Yageo / Phycomp", Part Number=RC0402JR-070RL
R25 R26: library part CMP-2000-00336-1, Manufacturer=Panasonic, Part Number=ERJ3EKF2201V
R27: library part CMP-2000-00484-1, Manufacturer=Panasonic, Part Number=ERJ-3EKF4020V
R28: library part CMP-1012-00623-3, "Chip Resistor, 10 KOhm, +/- 1%, 0.1 W, -55 to 155 degC, 0603 (1608 Metric), RoHS, Tape and Reel", Case Code (Imperial)=0603, Case Code (Metric)=1608, Manufacturer=Panasonic, Max Operating Temperature=155degC, Max Power Dissipation=100mW, Min Operating Temperature=-55degC, Package Description="2-Pin Surface Mount Device, Body 1.6 x 0.85 mm", Package Quantity=1, Package Reference=603, Resistance=10KOhm, Temperature Coefficient=100ppm\/degreesC, Tolerance=1%, Voltage Rating=75V, Case\/Package=0603, Composition=ThickFilm, Contact Plating=Tin, Datasheet URL=https://industrial.panasonic.com/cdbs/www-data/pdf/RDA0000/AOA0000C304.pdf, Datasheet Version=02/2017, Depth=0.8mm, Height=0.45mm, Lead Free=LeadFree, Length=1.6mm, Manufacturer URL=http://www.panasonic.com/, Military Standard=Not, Mount=SurfaceMount, Mounting Technology=SurfaceMount, Number of Pins=2, Number of Terminations=2, Packaging=TapeandReel, Power Rating=100mW, Radiation Hardening=No, REACH SVHC=NoSVHC, RoHSCompliant=true, Termination=SMD/SMT, Voltage Rating (DC)=75V, Width=0.031inch
R29 R30 R36 R37: library part CMP-2000-00538-1, Manufacturer=Panasonic, Part Number=ERJ-3EKF49R9V
R31 R32: library part CMP-2000-00651-1, Manufacturer=Panasonic, Part Number=ERJ-3EKF8062V
R34 R35: library part CMP-2000-00323-1, Manufacturer=Panasonic, Part Number=ERJ-3EKF2052V
R44 R45 R46 R47: library part CMP-2000-00540-8, "RES SMD 5.1K OHM 1% 1/10W 0603", Case Code (Imperial)=0603, Case Code (Metric)=1608, Max Operating Temperature=155°C, Max Power Dissipation=100mW, Min Operating Temperature=-55°C, Package Quantity=1, Resistance=5.1kR, Resistance Tolerance=1%, Resistor Type="Thick Film", Temperature Coefficient=100ppm/°C, Voltage Rating=75V, Case/Package=0603, Construction=Rectangular, Contact Plating=Tin, Depth=0.8mm, Features="Automotive AEC-Q200", Height=0.022inch, Lead Free="Lead Free", Length=1.6mm, Military Standard=Not, Mount="Surface Mount", Number of Terminations=2, Packaging="Tape and Reel", Power Rating=100mW, Radiation Hardening=No, Reach SVHC Compliant=Yes, RoHS Compliant=Yes, Series=ERJ, Size Code=0603, Termination=SMD/SMT, Tolerance=1%, Voltage Rating (DC)=75V, Weight=7.1E-05oz, Width=0.8mm
TP1 TP2 TP3 TP4 TP5 TP6 TP7 TP8 TP9 TP10 TP11 TP12 TP13 TP14 TP15 TP16 TP17 TP18 TP19 TP20 TP21 TP22 TP23 TP24 TP25 TP26 TP27 TP28 TP29 TP30 TP31 TP32 TP33 TP34 TP35: library part CMP-00025-2, "Test Point .6mm"
U1: library part CMP-015-00011-2, "Quad Tunneling GMSL2/1 to CSI-2 Deserializer"
U2: library part CMP-0244-00308-1, "Fixed Low Drop Positive Voltage Regulator, 1.8V, 4-Pin SOT-223, Tape and Reel", ComponentLink1Description="Manufacturer URL", ComponentLink1URL=http://www.st.com, ComponentLink2Description=Datasheet, ComponentLink2URL=http://www.st.com/internet/com/TECHNICAL_RESOURCES/TECHNICAL_LITERATURE/DATASHEET/CD00000544.pdf, DatasheetVersion=1/11/2011, PackageDescription="4-Pin SOT-223 Package, 6.5 x 3.5 mm Body, 2.3 mm Pitch, 7 mm Lead Span", PackageReference=SOT-223, PackageVersion=2010
U3: library part CMP-0244-00318-1, "Fixed Low Drop Positive Voltage Regulator, 1.2V, 4-Pin SOT-223, Tape and Reel", ComponentLink1Description="Manufacturer URL", ComponentLink1URL=http://www.st.com, ComponentLink2Description=Datasheet, ComponentLink2URL=http://www.st.com/internet/com/TECHNICAL_RESOURCES/TECHNICAL_LITERATURE/DATASHEET/CD00000544.pdf, DatasheetVersion=1/11/2011, PackageDescription="4-Pin SOT-223 Package, 6.5 x 3.5 mm Body, 2.3 mm Pitch, 7 mm Lead Span", PackageReference=SOT-223, PackageVersion=2010
Y1: library part CMP-2000-05733-3, "Crystal 25MHz ±20ppm (Tol) ±30ppm (Stability) 18pF FUND 60Ω 4-Pin SMD T/R", Case/Package=CSMD, ESR (Equivalent Series Resistance)=60R, Frequency=25MHz, Frequency Stability=30ppm, Frequency Tolerance=20ppm, Load Capacitance=18pF, Max Operating Temperature=85°C, Min Operating Temperature=-40°C, Operating Frequency="25 MHz", Package Quantity=1000, Depth=2.5mm, Height=0.039inch, Lead Free="Lead Free", Length=3.2mm, Mount="Surface Mount", Number of Pins=4, Packaging="Tape and Reel", Radiation Hardening=No, Series=ABM8G, Series Resistance=60R, Termination=SMD/SMT, Tolerance=20ppm, Width=0.098inch

## Via types
v1: diameter 0.5, hole 0.2, Top Layer to Bottom Layer, 16 vias

## Nets (pads, with @x,y where several pads share a name; then routed paths per layer and width w, separated by ;. In a path a pad name is that pad's centre, name@x,y a point inside that pad or via, vN(x,y) a via of type N, cw(c..) or ccw(c..) an arc to the next point about the centre after c; other vN are vias at no path point)
3V3: R5.2 R6.2 R23.2 R24.2
3V3_AUX: J7.1 P1.2 R25.2 R26.2 R28.2 R31.2 R32.2 R42.1
CAM_1V2: C59.1 R38.1 R39.1 R43.1 U3.2 U3.4
CAM_1V8: C45.1 R40.1 R41.1 U2.2 U2.4
CAM_I2C_SCL: R14.2 R16.2 R26.1 TP24.1 U1.29
CAM_I2C_SDA: R8.2 R10.2 R25.1 TP22.1 U1.28
CAM_nPWDN: R33.2 TP9.1 TP32.1
CFG0: R32.1 R35.2 TP34.1 U1.4
CKA_N: TP19.1 U1.40
CKA_P: TP18.1 U1.39
CKB_N: C41.1 U1.46
CKB_P: C38.1 U1.45
CKC_N: C27.1 U1.34
CKC_P: C24.1 U1.33
CKF_N: TP21.1 U1.52
CKF_P: TP20.1 U1.51
CSI0_CK_N: C27.2 R1.2 R2.2
CSI0_CK_P: C24.2 R3.2 R4.2
CSI0_D0_N: C15.2 J1.2
CSI0_D0_P: C14.2 J1.3
CSI0_D1_N: C17.2 J1.5
CSI0_D1_P: C16.2 J1.6
CSI0_D2_N: C19.2 J2.2
CSI0_D2_P: C18.2 J2.3
CSI0_D3_N: C23.2 J2.5
CSI0_D3_P: C22.2 J2.6
CSI0A_IO0: J1.11 TP1.1
CSI0A_IO1: J1.12 TP3.1
CSI0A_SCL: J1.13 R13.1 TP5.1
CSI0A_SDA: J1.14 R7.1 TP7.1
CSI0B_IO0: J2.11 TP2.1
CSI0B_IO1: J2.12 TP4.1
CSI0B_SCL: J2.13 R17.1 TP6.1
CSI0B_SDA: J2.14 R11.1 TP8.1
CSI1_CK_N: C41.2 R19.2 R20.2
CSI1_CK_P: C38.2 R21.2 R22.2
CSI1_D0_N: C29.2 J3.2
CSI1_D0_P: C28.2 J3.3
CSI1_D1_N: C31.2 J3.5
CSI1_D1_P: C30.2 J3.6
CSI1_D2_N: C33.2 J4.2
CSI1_D2_P: C32.2 J4.3
CSI1_D3_N: C37.2 J4.5
CSI1_D3_P: C36.2 J4.6
CSI1A_IO0: J3.11 TP10.1
CSI1A_IO1: J3.12 TP12.1
CSI1A_SCL: J3.13 R15.1 TP14.1
CSI1A_SDA: J3.14 R9.1 TP16.1
CSI1B_IO0: J4.11 TP11.1
CSI1B_IO1: J4.12 TP13.1
CSI1B_SCL: J4.13 R18.1 TP15.1
CSI1B_SDA: J4.14 R12.1 TP17.1
DA0_N: C15.1 U1.32
DA0_P: C14.1 U1.31
DA1_N: C17.1 U1.36
DA1_P: C16.1 U1.35
DA2_N: C19.1 U1.38
DA2_P: C18.1 U1.37
DA3_N: C23.1 U1.42
DA3_P: C22.1 U1.41
DB0_N: C29.1 U1.44
DB0_P: C28.1 U1.43
DB1_N: C31.1 U1.48
DB1_P: C30.1 U1.47
DB2_N: C33.1 U1.50
DB2_P: C32.1 U1.49
DB3_N: C37.1 U1.54
DB3_P: C36.1 U1.53
GND: C1.2 C2.2 C3.1 C4.1 C5.1 C6.2 C7.2 C8.2 C9.2 C10.2 C11.2 C12.2 C13.2 C42.1 C43.1 C44.1 C45.2 C46.1 C47.1 C48.1 C49.1 C50.1 C51.1 C52.1 C53.1 C54.1 C55.1 C56.1 C57.1 C58.1 C59.2 C60.1 C61.1 C62.1 C63.1 C64.2 C65.2 C66.2 C67.2 D1.3 D1.8 D2.3 D2.8 D3.3 D3.8 D4.3 D4.8 J1.1 J1.4 J1.7 J1.10 J2.1 J2.4 J2.7 J2.10 J3.1 J3.4 J3.7 J3.10 J4.1 J4.4 J4.7 J4.10 J5.2 J6.2 J7.2 J8.MH1 J8.MH2 J8.MH3 J8.MH4 J8.MH5 R27.1 R29.1 R30.1 R34.1 R35.1 R36.1 R37.1 U1.57 U2.1 U3.1 Y1.2 Y1.4
  other v1: 381,-64.333 380.222,-63.556 381.778,-63.556 379.444,-62.778 381,-62.778 382.556,-62.778 378.667,-62 380.222,-62 381.778,-62 383.333,-62 379.444,-61.222 381,-61.222 382.556,-61.222 380.222,-60.444 381.778,-60.444 381,-59.667
LO_VCC: C44.2 C58.2 J6.1 P1.1 U2.3 U3.3
MFP0: TP26.1 U1.1
MFP1: TP28.1 U1.2
MFP2: TP30.1 U1.3
MFP3: TP23.1 U1.12
MFP4: TP25.1 U1.13
MFP5: TP27.1 U1.14
MFP6: R31.1 R34.2 TP29.1 U1.25
MFP7: TP31.1 U1.26
MFP8: TP33.1 U1.27
NetC6_1: C6.1 C7.1 J1.15 R5.1
NetC8_1: C8.1 C9.1 J2.15 R6.1
NetC10_1: C10.1 C11.1 J3.15 R23.1
NetC12_1: C12.1 C13.1 J4.15 R24.1
NetC25_2: C25.2 R29.2
NetC26_2: C26.2 R30.2
NetC39_2: C39.2 R36.2
NetC40_2: C40.2 R37.2
NetC46_2: C46.2 C47.2 U1.8
NetC48_2: C48.2 C49.2 U1.20
NetC50_2: C50.2 C51.2 R38.2 U1.55
NetC52_2: C52.2 C53.2 R39.2 U1.56
NetC54_2: C54.2 C55.2 R40.2 U1.7
NetC56_2: C56.2 C57.2 R41.2 U1.21
NetC60_2: C60.2 C61.2 R42.2 U1.24
NetC62_2: C62.2 C63.2 R43.2 U1.30
NetC64_1: C64.1 F2.2 L1.1 R44.1
NetC65_1: C65.1 F3.2 L3.1 R45.1
NetC66_1: C66.1 F4.2 L5.1 R46.1
NetC67_1: C67.1 F5.2 L7.1 R47.1
NetJ1_8: J1.8 R1.1
NetJ1_9: J1.9 R3.1
NetJ2_8: J2.8 R2.1
NetJ2_9: J2.9 R4.1
NetJ3_8: J3.8 R19.1
NetJ3_9: J3.9 R21.1
NetJ4_8: J4.8 R20.1
NetJ4_9: J4.9 R22.1
NetL1_2: L1.2 L2.1 R44.2
NetL3_2: L3.2 L4.1 R45.2
NetL5_2: L5.2 L6.1 R46.2
NetL7_2: L7.2 L8.1 R47.2
NetR7_2: R7.2 R8.1 R11.2
NetR9_2: R9.2 R10.1 R12.2
NetR13_2: R13.2 R14.1 R17.2
NetR15_2: R15.2 R16.1 R18.2
NetR28_1: R28.1 R33.1 U1.11
PoC_A: C20.2 D1.1 D1.10 J8.3 L2.2
PoC_B: C21.2 D2.5 D2.6 J8.4 L4.2
PoC_C: C34.2 D3.1 D3.10 J8.1 L6.2
PoC_D: C35.2 D4.5 D4.6 J8.2 L8.2
PoC_PWR: C1.1 C2.1 C3.2 C4.2 C5.2 F1.1 F2.1 F3.1 F4.1 F5.1 TP35.1
SIOA_N: C25.1 U1.22
SIOA_P: C20.1 U1.23
SIOB_N: C26.1 U1.19
SIOB_P: C21.1 U1.18
SIOC_N: C39.1 U1.9
SIOC_P: C34.1 U1.10
SIOD_N: C40.1 U1.6
SIOD_P: C35.1 U1.5
VCC: F1.2 J5.1
X25_N: C43.2 U1.16 Y1.3
X25_P: C42.2 U1.15 Y1.1
XRES: R27.2 U1.17
pads on no net: D1.2 D1.4 D1.5 D1.6 D1.7 D1.9 D2.1 D2.2 D2.4 D2.7 D2.9 D2.10 D3.2 D3.4 D3.5 D3.6 D3.7 D3.9 D4.1 D4.2 D4.4 D4.7 D4.9 D4.10